# Altium PCB Flight_Controller.PcbDoc
Units mil, origin at the board's own origin, x right, y up, seen from the top; angles counter-clockwise.
Board outline 1417.32 x 1417.32 mil, 2 copper layers (Top Layer, Bottom Layer), stack 62.8 mil thick; 52 components, 47 nets, 221 pads, 95 vias.
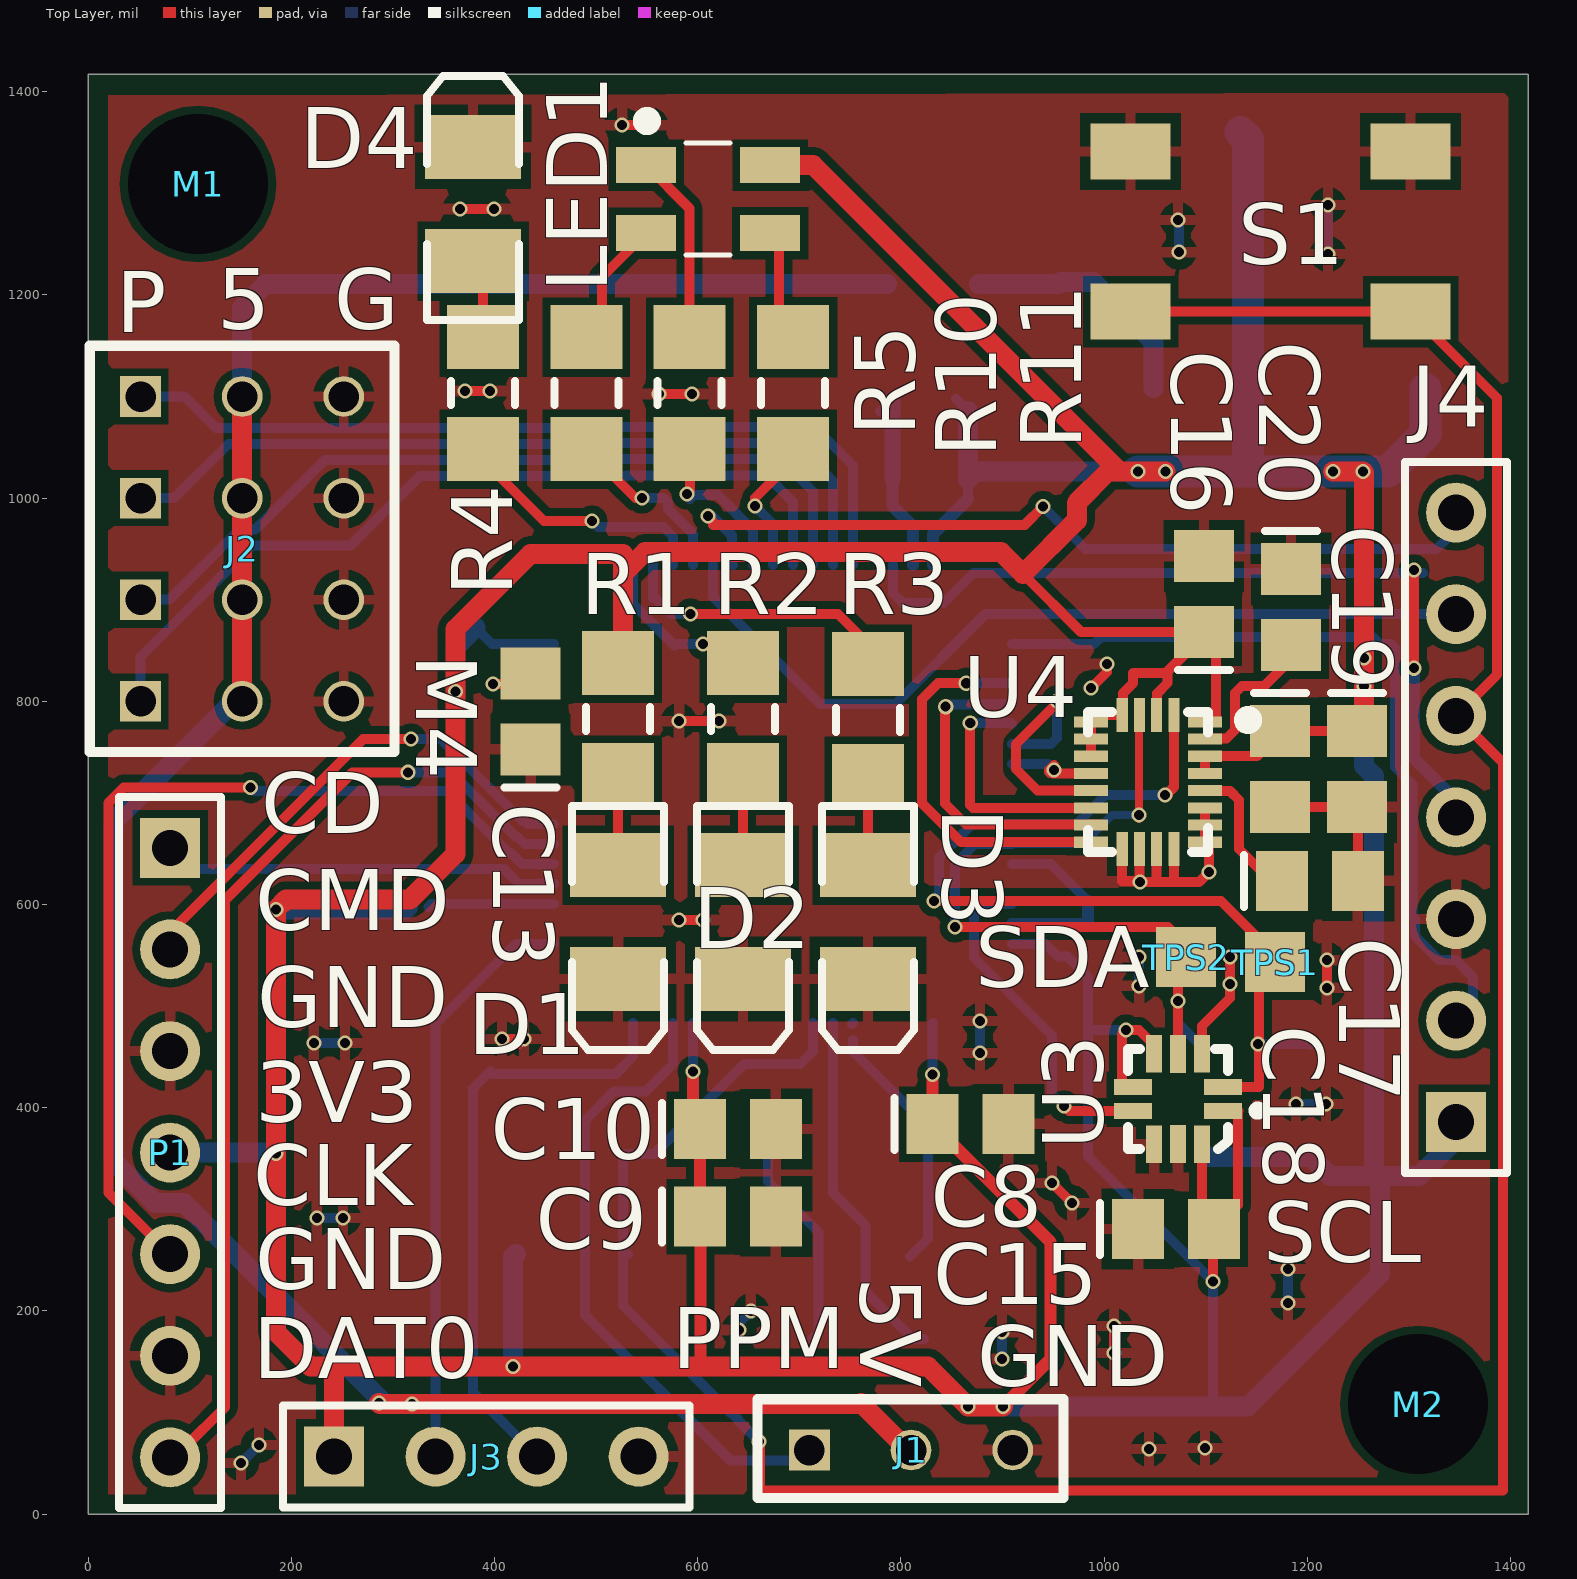
[diagram p0: Top Layer view]
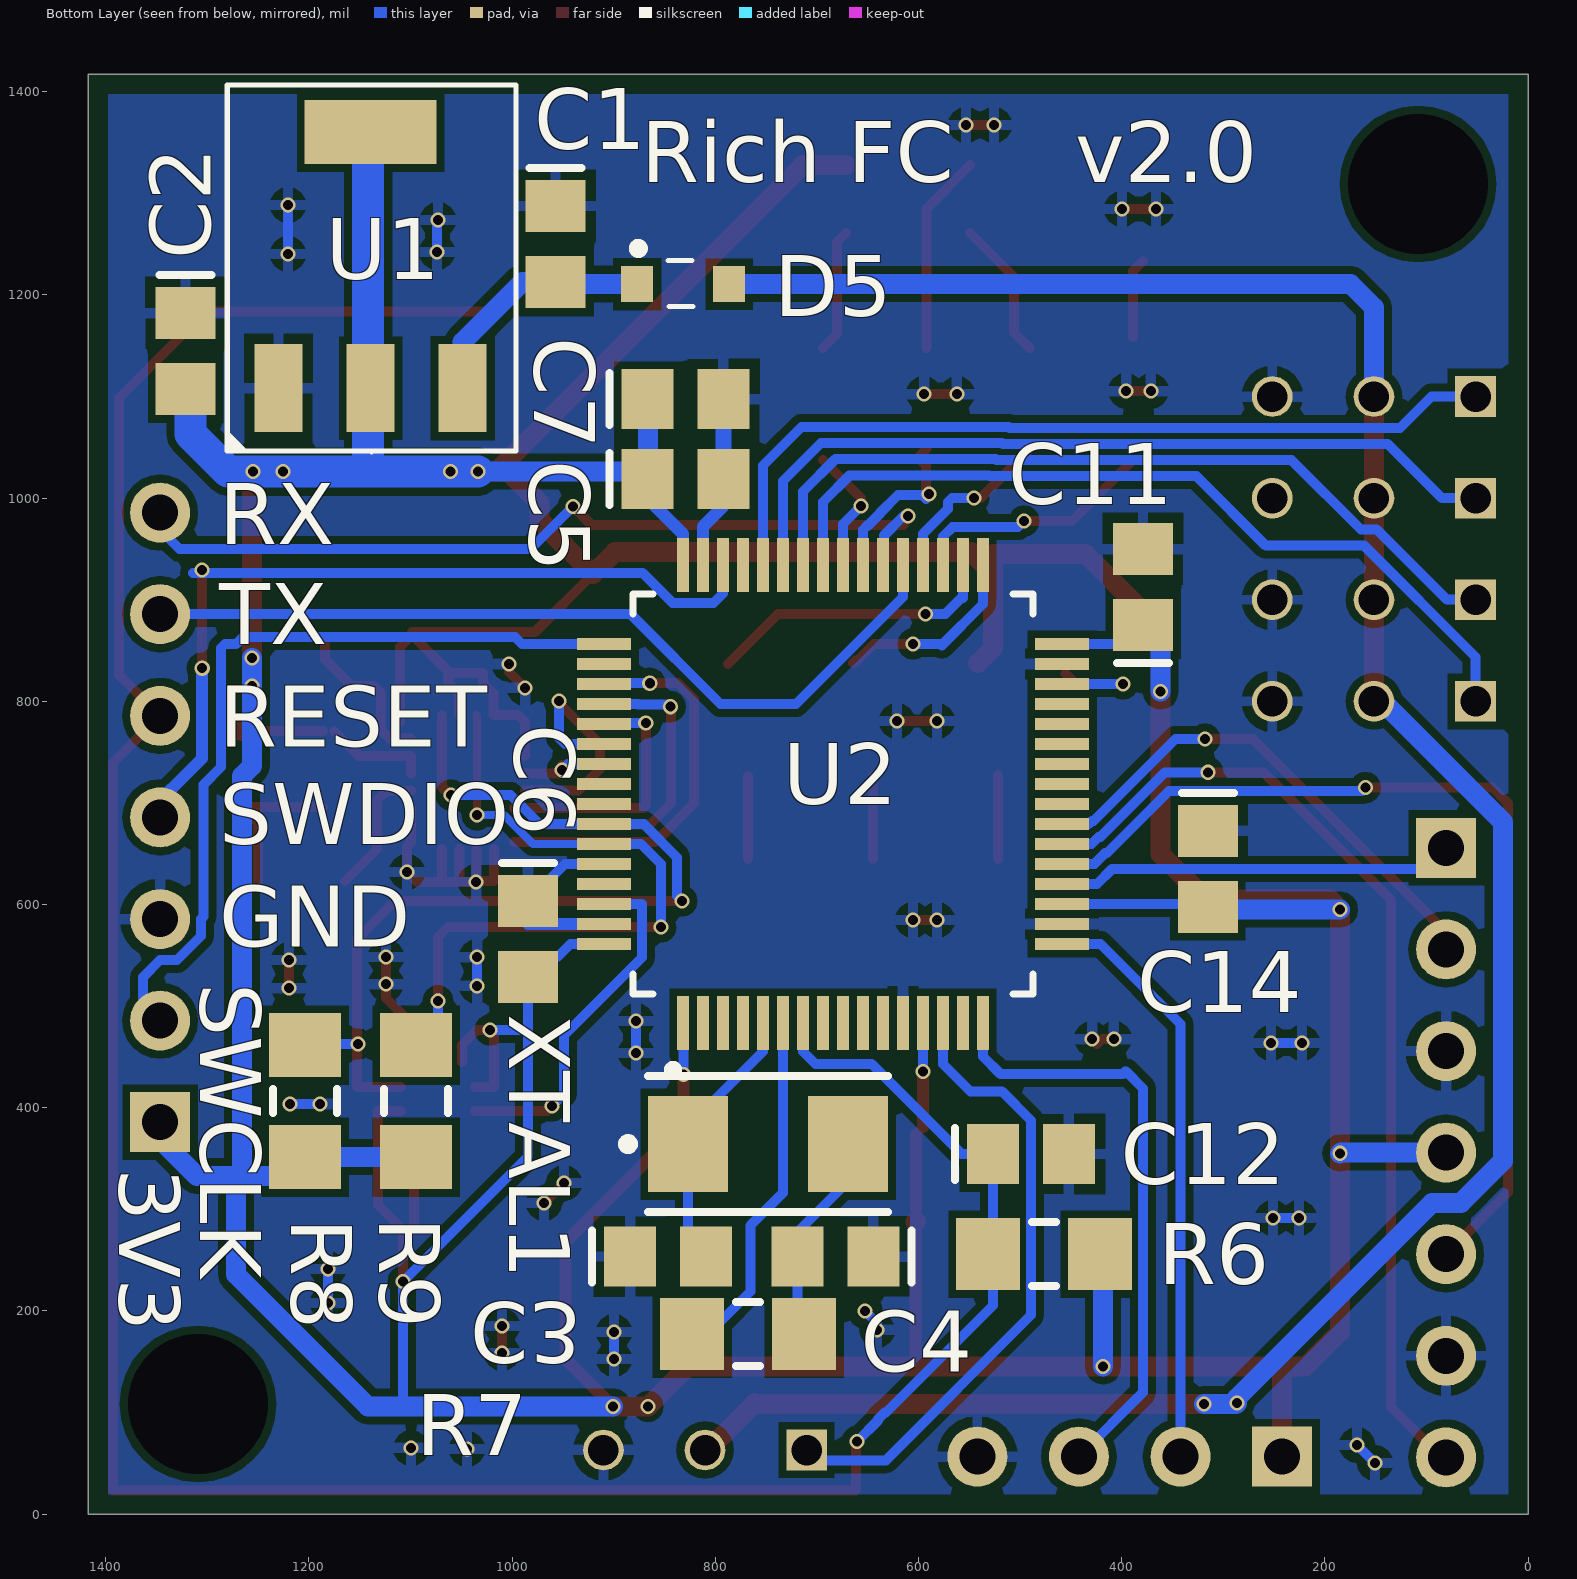
[diagram p1: Bottom Layer view, seen from below]

## Layer stack, top to bottom
Top Solder: solder mask 1, Solder Resist, Dk 3.5
Top Layer: signal copper 1.4
Dielectric 1: dielectric 60, FR-4, Dk 4.8
Bottom Layer: signal copper 1.4
Bottom Solder: solder mask 1, Solder Resist, Dk 3.5

## Board outline
0,0 1417.32,0 1417.32,1417.32 0,1417.32

## Design rules (kind name [scope] priority, off if disabled: settings)
BoardOutlineClearance [(OnLayer('Top Layer') OR OnLayer('Bottom Layer') OR OnLayer('Multi-Layer'))] p1: gap=15 ignorepadtopadclearanceinfootprint=FALSE
Clearance Clearance_Polygon [InPolygon and InNet('GND')] p1: gap=7.87 ignorepadtopadclearanceinfootprint=FALSE
Clearance [All] p2: gap=6 ignorepadtopadclearanceinfootprint=FALSE except(10: Fill-Fill Fill-Poly Fill-Region Poly-Poly Poly-Region Region-Region)
HoleSize [All] p1: absolutevalues=TRUE maxlimit=157.48 minlimit=1 maxpercent=80.000 minpercent=20.000
MinimumSolderMaskSliver [All] p1: minsoldermaskwidth=4
PolygonConnect [All] p1: connectstyle=Relief reliefconductorwidth=10 reliefentries=4 polygonreliefangle="90 Angle" airgapwidth=10
RoutingVias [All] p1: holewidth=10 width=15 viastyle="Through Hole" minholewidth=10 minwidth=15 maxholewidth=23.62 maxwidth=39.37
SolderMaskExpansion [All] p1: expansion=3.15
Width [All] p1: maxlimit=39.37 minlimit=6 preferedwidth=9.84 minimp=50.000000 maximp=50.000000 favimp=50.000000
28 further rules are at their usual default settings.

## Components (designator, comment, footprint, x,y, rotation, side; value= is the part's Value field where it differs from the comment)
C1 "Cap" C0805 957.18,1250 r270 bottom value=10uF
C2 "Cap" C0805 1321.36,1144.68 r270 bottom value=10uF
C3 "Cap" C0805 846.46,253.44 r180 bottom value=8pF
C4 "Cap" C0805 681.59,253.44 r0 bottom value=8pF
C5 "Cap" C0805 829.23,1018.7 r180 bottom value=100nF
C6 "Cap" C0805 984.25,565.94 r270 bottom value=100nF
C7 "Cap" C0805 829.23,1097.44 r180 bottom value=4.7uF
C8 "Cap" C0805 868.6,383.86 r0 top value=100nF
C9 "Cap" C0805 639.76,292.81 r0 top value=1uF
C10 "Cap" C0805 639.76,378.94 r0 top value=100nF
C11 "Cap" C0805 378.94,912.4 r90 bottom value=100nF
C12 "Cap" C0805 489.17,354.33 r180 bottom value=100nF
C13 "Cap" C0805 435.53,789.86 r90 top value=4.7uF
C14 "Cap" C0805 315,635 r270 bottom value=100nF
C15 "Cap" C0805 1070.87,280.51 r0 top value=100nF
C16 "Cap" C0805 1098.43,905.31 r90 top value=100nF
C17 "Cap" C0805 1212.6,623.03 r0 top value=10nF
C18 "Cap" C0805 1173.23,733.27 r270 top value=100nF
C19 "Cap" C0805 1249.02,733.27 r270 top value=10uF
C20 "Cap" C0805 1184.06,892.72 r270 top value=100nF
D1 "150141GS73100" 150141RS73100 521.65,582.68 r270 top
D2 "150141RS73100" 150141RS73100 644.69,582.68 r270 top
D3 "150141RS73100" 150141RS73100 767.72,582.68 r270 top
D4 "150141RS73100" 150141RS73100 378.94,1289.37 r90 top
D5 "Schottky Diode" SOD323 831.69,1210.63 r180 bottom
J1 "Header_3x1" Header_3x1 710.04,62.99 r90 top
J2 "Header 4x3" Header_4x3 151.67,899.9 r0 top
J3 "Header 4" HDR1X4 242.03,56.59 r0 top
J4 "Header 7" HDR1X7 1346.46,385.63 r90 top
LED1 "RGB" 1411LED 610.24,1294.29 r0 top
M1 "M3_Mounting_Hole" M3_Mounting_Hole 108.27,1309.06 r0 top
M2 "M3_Mounting_Hole" M3_Mounting_Hole 1309.06,108.27 r0 top
P1 "Header 7" HDR1X7 80.71,655.71 r270 top
R1 "Res" 3216[1206] 521.65,782.48 r270 top value=1K
R2 "Res" 3216[1206] 644.69,782.48 r270 top value=1K
R3 "Res" 3216[1206] 767.72,781.5 r270 top value=1K
R4 "Res" 3216[1206] 388.78,1103.35 r90 top value=1K
R5 "Res" 3216[1206] 490.49,1103.35 r90 top value=1K
R6 "Res" 3216[1206] 476.38,255.91 r180 bottom value=1K
R7 "Res" 3216[1206] 767.72,177.17 r180 bottom value=640
R8 "Res" 3216[1206] 1203.74,406.5 r90 bottom value=4.7k
R9 "Res" 3216[1206] 1094.49,406.5 r90 bottom value=4.7k
R10 "Res" 3216[1206] 592.19,1103.35 r90 top value=1K
R11 "Res" 3216[1206] 693.9,1103.35 r90 top value=1K
S1 "Pushbutton" TactileSwitch 1163.88,1262.3 r180 top
TPS1 "Test_point_SMD" TEST_POINT_SMD 1168.31,543.31 r90 top
TPS2 "Test_point_SMD" TEST_POINT_SMD 1080.71,548.23 r90 top
U1 "U_AZ1117EH-3.3TRG1" SOT223 1139.27,1225.39 r180 bottom
U2 "STM32F410RBT6" "LQFP-64 10x10mm" 684.06,708.66 r180 bottom
U3 "LPS25HB" "HLGA-10L - narrow" 1072.83,408.46 r180 top
U4 "LSM9DS1" "LGA-24 - NARROW - Long Pads" 1043.31,720.47 r270 top
XTAL1 "NX5032GA 25MHz" NX5032GA 748.03,364.17 r180 bottom

## Footprints (in the part's own frame and the unit in brackets; to place one, negate y for a bottom-side part, rotate by r counter-clockwise, add the part's x,y. Pads: shape width x height; smd on the part's side, far side on the other; paste and mask are expansions set on the pad)
1411LED [mm]
  rect 1.5x0.9 smd: 1(1.55,0.85) 2(1.55,-0.85) 3(-1.55,0.85) 4(-1.55,-0.85)
  silkscreen extent -1.7,-1.4 0.55,2.13, body extent -1.75,-1.4 1.75,1.4, height 1.89
3216[1206] [mm] "Chip Resistor; Body 3.2 x 1.6 mm (LxW typ)"
  rect 1.6x1.8 smd: 1(-1.4,0) 2(1.4,0)
  silkscreen extent -0.3,-0.8 0.3,0.8, body extent -1.6,-0.79 1.6,0.81, height 1
150141RS73100 [mm] "SMT LED; 1411"
  rect 1.6x2.4 smd: 1(-1.425,0) 2(1.425,0)
  silkscreen extent -2.9,-1.15 3.2,1.15, body extent -1.75,-1.4 1.75,1.4, height 1.6
C0805 [mm] "Chip Capacitor; Body 2.0 x 1.2 mm (LxW typ)"
  rect 1.3x1.5 smd: 1(-0.95,0) 2(0.95,0)
  silkscreen extent -1.9,-0.65 -1.9,0.65
HDR1X4 [mm] "Connector; Header; 4 Position"
  rect 1.5x1.5 hole 0.9: 1(0,0)
  round 1.5 hole 0.9: 2(2.54,0) 3(5.08,0) 4(7.62,0)
  silkscreen extent -1.27,-1.27 8.89,1.27
HDR1X7 [mm] "Connector; Header; 7 Position"
  rect 1.5x1.5 hole 0.9: 1(0,0)
  round 1.5 hole 0.9: 2(2.54,0) 3(5.08,0) 4(7.62,0) 5(10.16,0) 6(12.7,0) 7(15.24,0)
  silkscreen extent -1.27,-1.27 16.51,1.27
Header_3x1 [mil]
  rect 40x40 hole 30: 1(0,0)
  round 40 hole 30: 2(0,-100) 3(0,-200)
  silkscreen extent -47,-250 50,51
Header_4x3 [mil]
  rect 40x40 hole 30: 1(-100,200) 2(-100,100) 3(-100,0) 4(-100,-100)
  round 40 hole 30: 5(0,200) 6(0,100) 7(0,0) 8(0,-100) 9(100,200) 10(100,100) 11(100,0) 12(100,-100)
  silkscreen extent -150,-150 150,250
"HLGA-10L - narrow" [mm]
  rect 0.95x0.4 smd mask+0: 1(-1.12,0.3) 2(-1.12,-0.3) 6(1.12,-0.3) 7(1.12,0.3)
  rect 0.4x0.94 smd mask+0: 3(-0.6,-1.13) 5(0.6,-1.13) 8(0.6,1.13) 10(-0.6,1.13)
  rect 0.4x0.95 smd mask+0: 4(0,-1.12) 9(0,1.12)
  silkscreen extent -2.09,-1.25 1.25,1.25, body extent -1.25,-1.25 1.25,1.25, height 1
"LGA-24 - NARROW - Long Pads" [mm]
  rect 0.278x0.85 smd mask+0: 1(-1.505,1.425) 6(-1.505,-1.425) 7(-1.075,-1.425) 8(-0.645,-1.425) 9(-0.215,-1.425) 10(0.215,-1.425) 11(0.645,-1.425) 12(1.075,-1.425) 13(1.505,-1.425) 18(1.505,1.425) 19(1.075,1.425) 20(0.645,1.425) 21(0.215,1.425) 22(-0.215,1.425) 23(-0.645,1.425) 24(-1.075,1.425)
  rect 0.85x0.278 smd mask+0: 2(-1.675,0.645) 3(-1.675,0.215) 4(-1.675,-0.215) 5(-1.675,-0.645) 14(1.675,-0.645) 15(1.675,-0.215) 16(1.675,0.215) 17(1.675,0.645)
  silkscreen extent -1.75,-1.5 1.75,2.6, body extent -1.75,-1.5 1.75,1.5, height 1
"LQFP-64 10x10mm" [mm] "LQFP-64 10x10mm 0.5mm pitch"
  rect 0.29x1.35 smd mask+0.054: 1(-3.75,-5.725) 2(-3.25,-5.725) 3(-2.75,-5.725) 4(-2.25,-5.725) 5(-1.75,-5.725) 6(-1.25,-5.725) 7(-0.75,-5.725) 8(-0.25,-5.725) 9(0.25,-5.725) 10(0.75,-5.725) 11(1.25,-5.725) 12(1.75,-5.725) 13(2.25,-5.725) 14(2.75,-5.725) 15(3.25,-5.725) 16(3.75,-5.725) 33(3.75,5.725) 34(3.25,5.725) 35(2.75,5.725) 36(2.25,5.725) 37(1.75,5.725) 38(1.25,5.725) 39(0.75,5.725) 40(0.25,5.725) 41(-0.25,5.725) 42(-0.75,5.725) 43(-1.25,5.725) 44(-1.75,5.725) 45(-2.25,5.725) 46(-2.75,5.725) 47(-3.25,5.725) 48(-3.75,5.725)
  rect 1.35x0.29 smd mask+0.054: 17(5.725,-3.75) 18(5.725,-3.25) 19(5.725,-2.75) 20(5.725,-2.25) 21(5.725,-1.75) 22(5.725,-1.25) 23(5.725,-0.75) 24(5.725,-0.25) 25(5.725,0.25) 26(5.725,0.75) 27(5.725,1.25) 28(5.725,1.75) 29(5.725,2.25) 30(5.725,2.75) 31(5.725,3.25) 32(5.725,3.75) 49(-5.725,3.75) 50(-5.725,3.25) 51(-5.725,2.75) 52(-5.725,2.25) 53(-5.725,1.75) 54(-5.725,1.25) 55(-5.725,0.75) 56(-5.725,0.25) 57(-5.725,-0.25) 58(-5.725,-0.75) 59(-5.725,-1.25) 60(-5.725,-1.75) 61(-5.725,-2.25) 62(-5.725,-2.75) 63(-5.725,-3.25) 64(-5.725,-3.75)
  silkscreen extent -5,-7 5,5, body extent -6,-6 6,6, height 1.55
M3_Mounting_Hole [mm]
  round 1 hole 3.5 unplated mask+0: 0(0,0)
  body extent -3,-3 3,3, height 3
NX5032GA [mm] "NX5032GA Crystal Oscillator"
  rect 2x2.4 smd: 1(-2,0) 2(2,0)
  silkscreen extent -3.63,-1.7 3,1.7, body extent -2.51,-1.6 2.51,1.6, height 1.3
SOD323 [mm]
  rect 0.8x0.9 smd: 1(-1.15,0) 2(1.15,0)
  silkscreen extent -1.23,-0.56 0.25,1, body extent -0.83,-0.42 0.83,0.42, height 0.66
SOT223 [mm]
  rect 1.2x2.2 smd: 1(-2.3,-2.975) 2(0,-2.975) 3(2.3,-2.975)
  rect 3.3x1.6 smd: 4(0,3.425)
  silkscreen extent -3.58,-4.57 3.63,4.6, body extent -3.33,-2.93 3.43,3.86, height 1.3
TactileSwitch [mm]
  rect 2x1.4 smd: 1(-3.5,2) 1(3.5,2) 2(-3.5,-2) 2(3.5,-2)
TEST_POINT_SMD [mm]
  rect 1.5x1.5 smd: 1(0,0)

## Part data
C1 C2 C3 C4 C5 C6 C7 C8 C9 C10 C11 C12 C13 C14 C15 C16 C18 C19 C20: "Capacitor", LatestRevisionDate=17-Jul-2002, LatestRevisionNote="Re-released for DXP Platform.", PackageReference=C1206, Published=8-Jun-2000, Publisher="Altium Limited"
  C13: ESR="< 1 ohm"
C17: "Capacitor", Rating=16V, LatestRevisionDate=17-Jul-2002, LatestRevisionNote="Re-released for DXP Platform.", PackageReference=C1206, Published=8-Jun-2000, Publisher="Altium Limited"
D1: "Typical GREEN LED", Case/Package=1411, Case Code (Metric)=3528, Colour=Green, Forward Current=30, Forward Voltage=3.1, Manufacturer="Würth Elektronik (Wuerth Elektronik)", Max Operating Temperature=85, Min Operating Temperature=-40, Package Quantity=2000, Supplier Part Number 1=732-4997-1-ND, Test Current=20, Case Code (Imperial)=1411, ComponentLink1Description=https://datasheet.ciiva.com/23843/150141gs73100-23843266.pdf, ComponentLink1URL=https://datasheet.ciiva.com/23843/150141gs73100-23843266.pdf, ComponentLink2Description=https://datasheet.ciiva.com/22656/1911484-22656997.pdf, ComponentLink2URL=https://datasheet.ciiva.com/22656/1911484-22656997.pdf, ComponentLink3Description=https://datasheet.ciiva.com/29563/150141gs73100-29563029.pdf, ComponentLink3URL=https://datasheet.ciiva.com/29563/150141gs73100-29563029.pdf, ComponentLink4Description=https://datasheet.ciiva.com/29563/150141gs73100-29563030.pdf, ComponentLink4URL=https://datasheet.ciiva.com/29563/150141gs73100-29563030.pdf, ComponentLink5Description=https://datasheet.ciiva.com/48430/150141gs73100-eng-tds-48430060.pdf, ComponentLink5URL=https://datasheet.ciiva.com/48430/150141gs73100-eng-tds-48430060.pdf, ComponentLink6Description=https://datasheet.ciiva.com/29278/759463-da-01-en-smd-topled-einf-gruen-150141gs73100-29278953.pdf, ComponentLink6URL=https://datasheet.ciiva.com/29278/759463-da-01-en-smd-topled-einf-gruen-150141gs73100-29278953.pdf, Dominant Wavelength=525, Height=1.9, Lead Free="Lead Free", Length=3.5, Lens Style=Round,Clear, Luminous Intensity=1000, Manufacturer Part Number=150141GS73100, Packaging="Cut Tape", Pricing 1="1=0.17, 100=0.149, 500=0.113 (USD)", REACH SVHC=Unknown, Stock 1=572, Supplier 1=Digikey, Viewing Angle=120, Wavelength=525, Width=2.8
D2 D3 D4: "Typical RED LED", Case/Package=1411, Case Code (Metric)=3528, Colour=RED, Forward Current=30, Forward Voltage=2, Manufacturer="Würth Elektronik (Wuerth Elektronik)", Max Operating Temperature=85, Min Operating Temperature=-40, PackageDocument=Feb-2002, Package Quantity=2000, Test Current=20, Case Code (Imperial)=1411, ComponentLink1Description=https://datasheet.ciiva.com/29562/150141rs73100-29562993.pdf, ComponentLink1URL=https://datasheet.ciiva.com/29562/150141rs73100-29562993.pdf, ComponentLink2Description=https://datasheet.ciiva.com/29563/150141rs73100-29563031.pdf, ComponentLink2URL=https://datasheet.ciiva.com/29563/150141rs73100-29563031.pdf, ComponentLink3Description=https://datasheet.ciiva.com/29563/150141rs73100-29563032.pdf, ComponentLink3URL=https://datasheet.ciiva.com/29563/150141rs73100-29563032.pdf, ComponentLink4Description=https://datasheet.ciiva.com/29278/759464-da-01-en-smd-topled-einf-rot-150141rs73100-29278947.pdf, ComponentLink4URL=https://datasheet.ciiva.com/29278/759464-da-01-en-smd-topled-einf-rot-150141rs73100-29278947.pdf, Dominant Wavelength=625, Height=1.9, LatestRevisionDate=17-Jul-2002, LatestRevisionNote="Re-released for DXP Platform.", Length=3.5, Lens Style=Round,Clear, Luminous Intensity=300, Manufacturer Part Number=150141RS73100, PackageReference=3.2X1.6X1.1, Packaging="Tape and Reel", Pricing 2="1=0.17, 100=0.149, 500=0.113 (USD)", Published=8-Jun-2000, Publisher="Altium Limited", REACH SVHC=Unknown, Stock 2=5335, Supplier 1=Digi-Key, Supplier 2=Digikey, Supplier Part Number 2=732-5000-1-ND, Viewing Angle=120, Wavelength=625, Width=2.8
D5: library part DS_CUS08F30, "Diode Schottky 30V 800mA (DC) Surface Mount SOD-323", Capacitance @ Vr, F="170pF @ 0V, 1MHz", Current - Average Rectified (Io)=800mA, Current - Reverse Leakage @ Vr="50µA @ 30V", Manufacturer="Toshiba Semiconductor and Storage", Manufacturer Part Number=CUS08F30,H3F, Operating Temperature - Junction="125°C (Max)", Package / Case="SC-76, SOD-323", Supplier Device Package=USC, Supplier Part Number 1=CUS08F30H3FCT-ND, Voltage - DC Reverse (Vr) (Max)=30V, Voltage - Forward (Vf) (Max) @ If="220mV @ 10mA", Category="Discrete Semiconductor Products", ComponentLink1Description=https://toshiba.semicon-storage.com/info/docget.jsp?did=9019&prodName=CUS08F30, ComponentLink1URL=https://toshiba.semicon-storage.com/info/docget.jsp?did=9019&prodName=CUS08F30, Diode Type=Schottky, Mounting Type="Surface Mount", Packaging="Cut Tape (CT)", Part Status=Active, Pricing 1="1=0.49, 10=0.448, 25=0.3224, 100=0.2508, 250=0.15764, 500=0.13438, 1000=0.09138 (CAD)", Reverse Recovery Time (trr)=-, RoHS="RoHS Compliant", Speed="Fast Recovery =< 500ns, > 200mA (Io)", Stock 1=5288, Supplier 1=Digi-Key
J2: library part Header_4x3
J3: "Header, 4-Pin", LatestRevisionDate=17-Jul-2002, LatestRevisionNote="Re-released for DXP Platform.", Publisher="Altium Limited"
J4 P1: "Header, 7-Pin", LatestRevisionDate=17-Jul-2002, LatestRevisionNote="Re-released for DXP Platform.", Publisher="Altium Limited"
LED1: library part LED_150141M173100, "Wurth RGB LED 1411 pkg", Color="Red, Green, Blue (RGB)", Current - Test="20mA Red, 20mA Green, 20mA Blue", Lens Color=Colorless, Manufacturer="Wurth Electronics Inc", Manufacturer Part Number=150141M173100, Millicandela Rating="270mcd Red, 950mcd Green, 230mcd Blue", Package / Case="1411 (3528 Metric)", Supplier Device Package=3528, Supplier Part Number 1=732-4998-1-ND, Voltage - Forward (Vf) (Typ)="2V Red, 3.2V Green, 3.2V Blue", Category=Optoelectronics, ComponentLink1Description=http://katalog.we-online.de/led/datasheet/150141M173100.pdf, ComponentLink1URL=http://katalog.we-online.de/led/datasheet/150141M173100.pdf, Features=-, Height (Max)=2.10mm, Lens Style/Size="Round with Flat Top, 2.40mm", Lens Transparency=Clear, Mounting Type="Surface Mount", Packaging="Cut Tape (CT)", Pricing 1="1=0.95, 50=0.8294, 100=0.7583, 500=0.68724, 1000=0.63984 (CAD)", RoHS="RoHS Compliant", Size / Dimension="3.50mm L x 2.80mm W", Stock 1=986, Supplier 1=Digi-Key, Viewing Angle=120°, Wavelength - Dominant="625nm Red, 520nm Green, 470nm Blue", Wavelength - Peak="635nm Red, 515nm Green, 465nm Blue"
R1 R2 R3 R4 R5 R6 R7 R8 R9 R10 R11: "Surface Mount Resistor", LatestRevisionDate=17-Jul-2002, LatestRevisionNote="Re-released for DXP Platform.", PackageReference=AXIAL-0.5, Published=8-Jun-2000, Publisher="Altium Limited"
TPS1 TPS2: "Test Point SMD"
U1: "IC LDO 3.3V 1A", Current - Limit (Min)=-, Current - Output=1A, Manufacturer="Diodes Incorporated", Manufacturer Part Number=AZ1117EH-3.3TRG1, Operating Temperature="-40°C ~ 125°C", Package / Case="TO-261-4, TO-261AA", Supplier Device Package=SOT-223, Supplier Part Number 1=AZ1117EH-3.3TRG1DICT-ND, Voltage - Dropout (Typical)="1.1V @ 1A", Voltage - Input="Up to 13V", Voltage - Output=3.3V, Category="Integrated Circuits (ICs)", ComponentLink1Description=http://www.diodes.com/_files/datasheets/AZ1117E.pdf, ComponentLink1URL=http://www.diodes.com/_files/datasheets/AZ1117E.pdf, Mounting Type="Surface Mount", Number of Regulators=1, Packaging="Cut Tape (CT)", Pricing="1=0.61, 10=0.456, 100=0.2578, 500=0.1709, 1000=0.13108 (CAD)", Regulator Topology="Positive Fixed", RoHS="RoHS Compliant", Stock 1=13427, Supplier 1=Digi-Key
U2: library part STM32F410RB_PINOUT, "64-LQFP - Pinout Representation", Case/Package=LQFP, Frequency=100, Manufacturer=STMicroelectronics, Max Operating Temperature=85, Max Supply Voltage=3.6, Min Operating Temperature=-40, Min Supply Voltage=1.7, Supplier Part Number 1=497-16239-ND, ComponentLink1Description=http://www.farnell.com/datasheets/2006536.pdf, ComponentLink1URL=http://www.farnell.com/datasheets/2006536.pdf, Interface=I2C,SPI,IrDA,UART,USART,LIN, Lead Free="Lead Free", Manufacturer Part Number=STM32F410RBT6, Memory Size=128, Memory Type=FLASH, Number of I/Os=50, Number of Pins=64, Oscillator Type=Internal, Packaging=Tray, Peripherals="Brown-out Detect/Reset,POR,PWM,WDT,DMA", Pricing 2="1=4.4, 10=3.951, 100=3.237, 500=2.7556, 1000=2.324 (USD)", RAM Size=32, REACH SVHC="No SVHC", Supplier 1=Digikey
U3: Manufacturer=STMicroelectronics, Manufacturer Part Number=LPS25HBTR, Max Operating Temperature=105, Max Supply Voltage=3.6, Min Operating Temperature=-30, Min Supply Voltage=1.7, Operating Pressure=18.27, Supplier Part Number 1=497-15070-6-ND, ComponentLink1Description=http://www.farnell.com/datasheets/1992925.pdf, ComponentLink1URL=http://www.farnell.com/datasheets/1992925.pdf, ComponentLink2Description=http://www.st.com/st-web-ui/static/active/en/resource/technical/document/datasheet/DM00141379.pdf, ComponentLink2URL=http://www.st.com/st-web-ui/static/active/en/resource/technical/document/datasheet/DM00141379.pdf, Contact Plating=Nickel,Gold, Lead Free="Lead Free", Max Pressure=290.08, Mount="Surface Mount", Number of Pins=10, Port Style="No Port", Pricing 1="1=3.25, 10=2.917, 100=2.3901 (USD)", REACH SVHC="No SVHC", Stock 1=0, Supplier 1=Digikey, Termination=Solder
U4: Case/Package=LGA, Manufacturer=STMicroelectronics, Manufacturer Part Number=LSM9DS1TR, Max Operating Temperature=85, Max Supply Voltage=3.6, Min Operating Temperature=-40, Min Supply Voltage=1.9, Supplier Part Number 1=497-14946-6-ND, ComponentLink1Description=http://www.farnell.com/datasheets/2028150.pdf, ComponentLink1URL=http://www.farnell.com/datasheets/2028150.pdf, Lead Free="Lead Free", Number of Pins=24, Packaging="Cut Tape", Pricing 1="1=6.4, 10=5.751, 100=4.7119 (USD)", REACH SVHC="No SVHC", Stock 1=6141, Supplier 1=Digikey
XTAL1: library part NX5032GA, "NX5032GA", Case/Package=SMD/SMT, ESR (Equivalent Series Resistance)=70, Frequency=25, Frequency Stability=50, Load Capacitance=8, Manufacturer="Nihon Dempa Kogyo (NDK)", Manufacturer Part Number=NX5032GA-25.000000MHZ-LN-CD-1, Min Operating Temperature=-10, Package Quantity=1000, Supplier Part Number 1=644-1041-1-ND, ComponentLink1Description=https://datasheet.ciiva.com/856/nx5032ga-856797.pdf, ComponentLink1URL=https://datasheet.ciiva.com/856/nx5032ga-856797.pdf, ComponentLink2Description=https://datasheet.ciiva.com/856/nx5032ga-856798.pdf, ComponentLink2URL=https://datasheet.ciiva.com/856/nx5032ga-856798.pdf, ComponentLink3Description=https://datasheet.ciiva.com/856/nx5032ga-856799.pdf, ComponentLink3URL=https://datasheet.ciiva.com/856/nx5032ga-856799.pdf, Frequency Tolerance=50, Height=0.059, Length=0.197, Max Operating Temperature=70, Number of Pins=2, Packaging="Tape and Reel", Pricing 1="1=0.66, 10=0.55, 50=0.495, 100=0.44, 500=0.418 (USD)", Stock 1=128038, Supplier 1=Digikey, Width=0.126

## Via types
v1: diameter 15, hole 10, Top Layer to Bottom Layer, tented both sides, 62 vias
v2: diameter 15, hole 10, Top Layer to Bottom Layer, 33 vias

## Nets (pads, with @x,y where several pads share a name; then routed paths per layer and width w, separated by ;. In a path a pad name is that pad's centre, name@x,y a point inside that pad or via, vN(x,y) a via of type N, cw(c..) or ccw(c..) an arc to the next point about the centre after c; other vN are vias at no path point)
5V: D5.2 J1.2 J2.5 J2.6 J2.7 J2.8 | length 2481.4
  Top Layer w19.68: J2.8 J2.7 J2.6 J2.5 ; v2(286.42,109.25) 287.4,108.27 v2(318.9,108.27) 759.84,108.27 760.83,109.25 807.09,62.99 J1.2
  Bottom Layer w19.68: J2.8 143.44,799.9 24.84,681.3 24.84,347.41 66.15,306.1 94.48,306.1 286.42,114.16 v2(286.42,109.25) 287.4,108.27 v2(318.9,108.27) ; J2.5 151.67,1187.6 174.7,1210.63 D5.2
DEN_A/G: U2.51 U4.13 | length 391.5
  Top Layer w9.84: v1@864.96,817.72 v1(864.37,817.72) 836.61,817.72 820.87,801.97 820.87,699.5 859.15,661.22 U4.13 U4.13@998.03,661.22
  Bottom Layer w9.84: v1(864.37,817.72) 908.66,817.72 U2.51
DRDY_B: U2.62 U3.7 | length 351.1
  Top Layer w9.84: v2(960.63,401.57) 965.55,396.65 U3.7 U3.7@1036.61,396.65
  Bottom Layer w9.84: U2.62 871.95,600.39 871.95,547.83 948.82,470.96 948.82,413.39 v2(960.63,401.57)
DRDY_M: U2.55 U4.9 | length 101.9
  Top Layer w9.84: v1@946.9,729.38 945.87,730.41 v1@945.87,732.37 ; v1(950.79,732.28) 950.79,737.29 v1@945.87,732.37 ; U4.9 949.3,728.94 v1@945.87,732.37
  Bottom Layer w9.84: U2.55 944.88,738.19 v1(950.79,732.28)
GND: C1.1 C2.1 C3.1 C4.1 C5.2 C6.1 C7.2 C8.2 C9.2 C10.2 C11.2 C12.2 C13.1 C14.1 C15.1 C16.2 C17.2 C18.2 C19.2 C20.1 D1.2 D2.2 D3.2 D4.2 J1.3 J2.9 J2.10 J2.11 J2.12 J3.4 J4.3 P1.3 P1.6 S1.2 U1.1 U2.12 U2.18 U2.31 U2.47 U2.60 U2.63 U3.3 U3.8 U3.9 U4.14 U4.15 U4.16 U4.17 U4.18 U4.19 U4.20 | length 1596.6
  Top Layer w9.84: v1(366.14,1284.45) v1(399.61,1284.45) ; v1(371.06,1105.32) v1(395.67,1105.32) ; v1(407.48,467.52) 419.29,467.52 424.21,462.6 v1(429.13,467.52) ; v1(525.59,1367.13) v1(553.15,1367.13) ; v1(562.01,1102.36) v1(594.49,1102.36) ; v1@579.72,780.51 v1(581.69,780.51) v1(621.06,780.51) ; v1(581.69,584.65) v1(605.32,584.65) ; v1(948.82,325.79) v1(968.5,306.1) ; v1(987.2,812.99) 1002.95,828.74 v1(1002.95,836.61) ; v1(1009.84,158.46) v1(1009.84,185.04) ; U4.14 1017.91,623.03 1033.46,623.03 1035.43,621.06 v1(1035.43,622.2) ; U4.15 1034.84,622.8 v1(1035.43,622.2) ; U4.16 1051.77,623.62 1050.35,622.2 ; U4.17 1068.7,622.83 1068.07,622.2 ; U3.3@1096.75,445.37 1096.45,445.08 U3.3 1096.45,480.31 1124.02,507.87 v1(1124.02,521.65) v1(1124.02,548.23) v1@1125,548.23 ; v1(1099.41,64.96) v1@1099.41,67.91 ; U4.20 U4.19 U4.18 1103.35,657.28 v1(1103.35,631.89) 1093.66,622.2 1068.07,622.2 ; C18.2@1186.02,695.87 C19.2 1265.75,695.87 1250,680.12 C17.2 ; v1(1219.49,517.72) v1(1219.49,545.28) ; v1(1035.43,622.2) 1050.35,622.2 ; 1050.35,622.2 1068.07,622.2
  Bottom Layer w9.84: v1(150.59,50.2) v1(168.31,67.91) ; v1(222.44,463.58) v1(252.95,463.58) ; v1(225.39,291.34) v1(250.98,291.34) ; v1(640.75,181.1) 640.75,187.99 v1(652.56,199.8) ; C7.2@779.53,1085.14 C7.2 ; v1(877.95,453.74) v1(877.95,485.24) ; v1(899.61,152.56) v1(899.61,179.13) ; U2.60 947.83,639.76 C6.1 ; v1(1034.45,519.68) v1(1034.45,548.23) ; v1(1072.83,1273.62) 1073.82,1272.64 v1(1073.82,1242.13) ; v1(1181.1,207.68) v1(1181.1,241.14) ; v1@1187.99,403.54 v1(1188.98,403.54) v1(1218.5,403.54) ; v1(1220.47,1240.16) v1(1220.47,1288.39)
  Bottom Layer w11.81: C5.2 791.83,992.13 812.01,971.95 U2.47 ; U2.63 984.25,580.71 C6.1
  Bottom Layer w15.75: C5.2 C7.2
  other v1: 1044.29,63.98
INT1_A/G: U2.53 U4.11 | length 253.1
  Top Layer w9.84: v1(868.3,778.54) 868.3,697.83 871.06,695.08 U4.11 U4.11@998.03,695.08
  Bottom Layer w9.84: v1(868.3,778.54) 908.46,778.54 U2.53
INT2_A/G: U2.52 U4.12 | length 325.1
  Top Layer w9.84: v1@843.5,794.67 843.5,699.27 864.08,678.69 U4.12@986.66,678.69 ; U4.12 U4.12@986.66,678.69 ; U4.12@997.49,678.69 U4.12@986.66,678.69
  Bottom Layer w9.84: v1(844.11,794.67) 846.41,796.96 875.93,796.96 876.21,797.24 U2.52
INT_M: U2.54 U4.10 | length 249.4
  Top Layer w9.84: v1(953.74,800.2) 953.74,798.23 913.39,757.87 913.39,733.27 934.65,712.01 U4.10
  Bottom Layer w9.84: U2.54 947.83,757.87 953.74,763.78 v1(953.74,800.2)
LED1: R2.1 U2.33 | length 192.2
  Top Layer w9.84: v1(605.32,856.3) 643.7,856.3 660.92,839.07 661.91,840.06 R2.1@664.37,837.6
  Bottom Layer w9.84: U2.33 536.42,895.67 577.02,855.07 578.25,856.3 v1(605.32,856.3)
LED2: R3.1 U2.34 | length 290.7
  Top Layer w9.84: v1(593.01,885.83) 738.19,885.83 R3.1@787.4,836.61
  Bottom Layer w9.84: U2.34 556.1,901.57 557.86,901.57 573.61,885.83 v1(593.01,885.83)
LED3: R4.1 U2.35 | length 246.2
  Top Layer w9.84: R4.1@388.78,1037.4 448.82,977.36 v2(496.06,977.36)
  Bottom Layer w9.84: v2(496.06,977.36) 501.87,971.55 566.33,971.55 575.79,962.1 U2.35
LED_B: R11.1 U2.40 | length 126.2
  Top Layer w9.84: v2(656.5,992.13) 656.5,1000 R11.1@693.9,1037.4
  Bottom Layer w9.84: v2(656.5,992.13) 674.21,974.41 U2.40
LED_G: R5.1 U2.36 | length 174.2
  Top Layer w9.84: R5.1 538.71,1000 v2(545.28,1000)
  Bottom Layer w9.84: v2(545.28,1000) 566.93,1000 570.87,996.06 570.87,989.42 595.47,964.82 U2.36
LED_R: R10.1 U2.39 | length 164.8
  Top Layer w9.84: v2(589.57,1003.94) 592.52,1006.89 592.52,1032.15 600.39,1040.03 R10.1
  Bottom Layer w9.84: v2@592.52,999.02 596.46,1002.95 620.08,1002.95 638.07,984.96 638.07,984.5 648.87,973.7 649.33,973.7 654.53,968.5 U2.39
NetC1_2: C1.2 D5.1 U1.3 | length 242.3
  Bottom Layer w19.68: D5.1 955.22,1210.63 C1.2 989.67,1212.6 1048.72,1153.54 U1.3
NetC4_2: C4.2 R7.2 XTAL1.2 | length 215.2
  Bottom Layer w9.84: XTAL1.2 669.29,327.26 719,277.56 C4.2 719,178.64 R7.2@712.6,172.24
NetC13_2: C13.2 U2.30 | length 120.9
  Top Layer w9.84: v2(398.62,816.93) 444.88,816.93 C13.2@455.22,827.26
  Bottom Layer w9.84: v2(398.62,816.93) U2.30
NetC17_1: C17.1 U4.21 | length 130.4
  Top Layer w9.84: U4.21 1099.41,711.46 1124.17,711.46 1132.78,702.85 1132.78,665.75 1132.87,665.66 1132.87,654.53 C17.1@1164.37,623.03
NetC20_2: C20.2 U4.24 | length 152.6
  Top Layer w9.84: U4.24 1099.95,763.34 1120.67,763.34 1128.94,771.61 1128.94,808.07 1135.83,814.96 1157.78,814.96 1184.06,841.23 C20.2
NetD1_1: D1.1 R1.2 | length 82.7
  Top Layer w9.84: D1.1@521.65,644.68 R1.2
NetD2_1: D2.1 R2.2 | length 82.7
  Top Layer w9.84: D2.1@644.69,644.69 R2.2
NetD3_1: D3.1 R3.2 | length 81.7
  Top Layer w9.84: D3.1@767.72,644.68 R3.2
NetD4_1: D4.1 R4.2 | length 78.9
  Top Layer w9.84: D4.1 388.78,1223.43 R4.2
NetJ4_2: J4.2 U2.49 | length 792.7
  Bottom Layer w9.84: U2.49 990.19,856.3 997.18,863.28 1264.51,863.28 1271.49,856.3 1282.48,856.3 1286.42,852.36 1286.42,735.15 1303.66,717.91 1303.66,587.96 1306.01,585.61 1306.01,568.88 1329.7,545.18 1346.43,545.18 1363.19,528.43 J4.2@1363.19,485.63
NetJ4_4: J4.4 U2.46 | length 833.5
  Top Layer w9.84: v2(1305.02,832.58) 1305.02,929.04 v2(1305.12,929.13)
  Bottom Layer w9.84: U2.46 792.32,906.01 801.78,896.56 841.93,896.56 871.44,926.08 1313.98,926.08
  Bottom Layer w11.81: v2(1305.02,832.58) 1305.02,743.8 J4.4@1363.19,685.63
NetLED1_2: LED1.2 R11.2 | length 122.6
  Top Layer w9.84: LED1.2 680.12,1251.97 680.12,1161.42 R11.2@693.9,1147.64
NetLED1_3: LED1.3 R10.2 | length 197.9
  Top Layer w9.84: LED1.3 592.19,1284.78 R10.2 R10.2@592.19,1147.64
NetLED1_4: LED1.4 R5.2 | length 137.5
  Top Layer w9.84: R5.2@490.49,1147.64 505.91,1163.06 505.91,1217.52 LED1.4
OSC_IN: C3.2 U2.5 XTAL1.1 | length 252.4
  Bottom Layer w9.84: U2.5@751.97,482.28 U2.5 ; U2.5@752.95,466.54 752.95,455.22 826.77,381.4 XTAL1.1 826.77,271.16 C3.2
OSC_OUT: R7.1 U2.6 | length 354.5
  Bottom Layer w9.84: U2.6 733.27,316.13 765.26,284.15 765.26,219 812.01,172.24 R7.1@822.83,172.24
PPM_IN: J1.1 U2.14 | length 625.9
  Bottom Layer w9.84: U2.14 575.79,442.91 548.72,415.85 517.53,415.85 489.08,387.4 489.08,195.86 632,52.94 699.98,52.94 J1.1
PWM_1: J2.1 U2.44 | length 828.1
  Bottom Layer w9.84: J2.1 95.1,1099.9 126.02,1068.98 510.16,1068.98 511.07,1069.89 715.11,1069.89 752.95,1032.05 U2.44
PWM_2: J2.2 U2.43 | length 802.2
  Bottom Layer w9.84: J2.2 84.9,999.9 138.14,1053.14 516.73,1053.14 517.63,1054.04 695.96,1054.04 733.27,1016.73 U2.43
PWM_3: J2.3 U2.42 | length 804.7
  Bottom Layer w9.84: J2.3 79.9,899.9 148.98,968.98 164.48,968.98 232.8,1037.3 523.29,1037.3 524.19,1038.2 681.8,1038.2 713.58,1006.42 U2.42
PWM_4: J2.4 U2.41 | length 832.9
  Bottom Layer w9.84: J2.4 51.67,843.63 161.18,953.14 258.14,953.14 326.45,1021.45 529.85,1021.45 530.76,1022.36 667.64,1022.36 693.9,996.1 U2.41
RESET: C12.1 J4.5 R6.1 S1.1 U2.7 | length 2915.1
  Top Layer w9.84: v2@661.48,72.35 661.48,23.56 661.83,23.21 1392.72,23.21 1392.72,739.37 J4.5 ; S1.1@1026.08,1183.56 S1.1@1291.34,1183.56 ; S1.1@1301.67,1183.56 1386.91,1098.33 1386.91,826.08 J4.5 ; J4.5@1328.05,785.63 J4.5 ; J4.5@1363.19,785.63 J4.5
  Bottom Layer w9.84: R6.1 R6.1@526.57,260.83 ; v2(660.48,71.36) 639.58,92.26 639.58,93.42 633.19,99.82 632.02,99.82 526.57,205.26 R6.1@526.57,260.83 ; U2.7 713.58,455.22 701.27,442.91 645.97,442.91 557.39,354.33 C12.1 R6.1@526.57,260.83
RF_COM_RX: J3.3 U2.16 | length 593.8
  Bottom Layer w9.84: J3.3 378.84,119.78 378.84,418.84 395.53,435.53 396.68,435.53 398.87,433.35 519.47,433.35 536.42,450.3 U2.16
RF_COM_TX: J3.2 U2.17 | length 574.9
  Bottom Layer w9.84: J3.2 342.03,482.28 420.77,561.02 U2.17
SENSOR_SCL: R8.2 TPS1.1 U2.58 U3.2 U4.2 | length 953.9
  Top Layer w9.84: v1(832.68,603.35) 1115.16,603.35 1152.56,565.94 1152.56,420.27 U3.2 U3.2@1109.05,420.27 ; v1(1060.09,707.71) v1@1061.06,707.71 ; v1@1062.96,707.71 v1@1061.06,707.71 ; U4.2 1068.7,715.35 v1@1061.06,707.71
  Bottom Layer w9.84: v1(832.68,603.35) 837.5,608.17 837.5,646.33 870.31,679.13 U2.58 972.96,679.13 1001.54,707.71 v1(1060.09,707.71) ; v1@1152.56,462.6 1202.76,462.6 R8.2
  other v1: 1151.57,462.6
SENSOR_SDA: R9.2 TPS2.1 U2.59 U3.4 U4.4 | length 767.6
  Top Layer w7.87: v1@1034.45,684.06 v1(1034.45,687.99) 1034.45,786.02 U4.4
  Top Layer w9.84: v1(853.35,577.76) 1062.99,577.76 1072.83,567.92 U3.4 U3.4@1072.83,444.68
  Bottom Layer w7.87: U2.59 979.33,659.45 1007.87,687.99 v1(1034.45,687.99)
  Bottom Layer w9.84: v1(853.35,577.76) 853.35,639.76 873.03,659.45 U2.59 ; v2@1072.83,507.87 1072.83,483.27 R9.2
  other v2: 1072.83,504.92
SPI1_MISO: P1.7 U2.22 | length 983.8
  Top Layer w9.84: P1.7@72.24,64.17 93.7,64.17 135,105.47 135,604.52 260.48,730 v2(315,730)
  Bottom Layer w9.84: v2(315,730) 357.35,730 421,666.35 422.76,666.35 429.66,659.45 U2.22
SPI1_MOSI: P1.2 U2.23 | length 515
  Top Layer w9.84: P1.2@63.98,555.91 270.87,762.8 v2(317.91,762.8)
  Bottom Layer w9.84: v2(317.91,762.8) 346.96,762.8 427.56,682.19 429.32,682.19 432.38,679.13 U2.23
SPI1_NSS: P1.1 U2.20 | length 409.5
  Bottom Layer w9.84: P1.1@63.98,655.91 85.22,634.66 409.64,634.66 424.22,620.08 U2.20
SPI1_SCK: P1.5 U2.21 | length 938.4
  Top Layer w9.84: P1.5@63.98,255.91 63.98,272.44 19.92,316.5 19.92,699.92 35,715 v2(160,715)
  Bottom Layer w9.84: v2(160,715) 163.42,711.58 353.36,711.58 414.44,650.5 416.2,650.5 426.94,639.76 U2.21
UART_RX: J4.7 U2.38 | length 860.7
  Top Layer w9.84: v2(610.24,982.28) 610.24,981.36 616.38,975.21 614.88,973.7 922.03,973.7 v2(939.96,991.63)
  Bottom Layer w9.84: v2(610.24,982.28) 614.66,982.28 634.06,962.89 634.06,934.86 U2.38 ; v2(939.96,991.63) 981.79,949.8 1327.36,949.8 J4.7@1363.19,985.63
UART_TX: J4.6 U2.37 | length 859.8
  Bottom Layer w9.84: U2.37 615.16,902.56 720.47,797.24 794.78,797.24 883.17,885.63 J4.6 J4.6@1363.19,885.63
VDD: C2.2 C5.1 C6.2 C7.1 C8.1 C9.1 C10.1 C11.1 C14.2 C15.2 C16.1 C18.1 C19.1 J3.1 J4.1 LED1.1 P1.4 R1.1 R6.2 R8.1 R9.1 U1.2 U1.4 U2.1 U2.13 U2.19 U2.32 U2.48 U2.64 U3.1 U3.5 U3.6 U3.10 U4.1 U4.3 U4.5 U4.6 U4.7 U4.8 U4.22 U4.23 | length 8859.2
  Top Layer w9.84: C10.1@595.47,380.91 C10.1@602.36,374.02 ; C9.1@602.36,287.89 C9.1 C9.1@602.36,300.2 ; 920.28,925.2 977.56,867.91 C16.1 C16.1@1098.43,865.16 ; U4.8 U4.7 U4.6 993.9,786.42 U4.5 1018.46,786.96 1018.46,807.67 1028.74,817.96 1028.74,827.56 1060.83,827.56 C16.1@1098.43,865.16 ; U3.6@1036.61,420.27 U3.6 1017.72,420.27 1017.72,472.44 v2(1021.65,476.38) 1034.45,476.38 1049.21,461.62 U3.5 U3.5@1049.21,445.08 ; U4.3 1052.31,786.96 1052.31,807.67 1062.6,817.96 1062.6,825.79 ; C15.2@1096.46,280.51 U3.10 U3.10@1096.46,372.24 ; U4.22 U4.23 1150.39,745.87 C18.1@1175.2,770.67 ; v2(1107.28,228.84) 1107.28,279.53 C15.2 1131.89,304.13 1131.89,396.16 1132.38,396.65 U3.1 U3.1@1109.05,396.65 ; U4.1@1110.24,779.72 1110.24,853.35 C16.1@1098.43,865.16 ; C18.1@1186.02,770.67 C19.1 C19.1@1265.75,770.67
  Top Layer w11.81: C10.1@595.47,380.91 v2@595.47,433.07 ; C9.1@602.36,300.2 C10.1@602.36,374.02 ; 602.85,145.18 C9.1@602.85,287.4 ; v2(831.2,432.58) C8.1 947.34,267.72 947.34,152.56 v2(900.59,105.81)
  Top Layer w19.68: J3.1 242.03,145.08 242.13,145.18 ; R1.1@541.34,837.6 526.57,852.36 526.57,925.2 ; C9.1@602.36,287.89 C9.1@602.85,287.4 ; LED1.1 713.58,1327.76 1015.26,1026.08 ; v2(900.59,105.81) v2(866.14,105.81) 826.77,145.18 602.85,145.18 v2(418.31,145.18) 242.13,145.18 ; v2(1060.53,1026.08) v2(1033.46,1026.08) 1015.26,1026.08 ; v2(1225.39,1026.08) v2(1254.92,1026.08) 1255.91,1025.1 v2(1255.91,842.52) v2(1255.91,814.96) 1255.91,780.51 C19.1@1265.75,770.67 ; 242.13,145.18 219,145.18 185,179.17 v2(185,355) 185,497.5 v2(185,595) 195,605 317.11,605 361.71,649.61 v2(361.71,809.55) 361.71,871.06 435.53,944.88 526.57,944.88 526.57,925.2 ; 526.57,925.2 548.23,946.85 898.62,946.85 920.28,925.2 973.18,978.1 973.18,995.32 1003.94,1026.08 1015.26,1026.08
  Bottom Layer w9.84: C14.2@335,597.6 337.8,600.39 U2.19 ; C11.1 381.4,872.54 397.64,856.3 U2.32 ; v2@595.47,433.07 v2(595.47,435.53) U2.13 ; v2(831.2,432.58) 831.2,482.78 U2.1 ; C7.1@854.33,1097.44 C7.1@866.14,1085.63 ; C5.1@866.14,999.02 C5.1@866.14,1018.7 ; U2.64 942.42,561.02 954.72,548.72 964.07,548.72 C6.2 984.25,476.38 ; v2(1021.65,476.38) 984.25,476.38 ; 1107.28,105.81 v2(1107.28,228.84) 984.25,351.87 984.25,476.38
  Bottom Layer w11.81: U2.48 831.69,964.57 C5.1@866.14,999.02
  Bottom Layer w19.68: P1.4@80.71,355.91 184.09,355.91 v2(185,355) ; v2(185,595) 312.4,595 C14.2 ; v2(361.71,809.55) 361.71,852.85 C11.1@381.4,872.54 ; v2(418.31,145.18) 418.31,252.95 R6.2 ; C7.1@866.14,1085.63 C5.1@866.14,1018.7 ; C5.1 C5.1@866.14,1018.7 ; v2(900.59,105.81) 1107.28,105.81 1141.73,105.81 1271.65,235.73 1271.65,332.68 ; v2(1033.46,1026.08) 873.52,1026.08 C5.1@866.14,1018.7 ; R9.1@1101.38,351.38 R8.1 1222.44,332.68 1271.65,332.68 ; v2(1255.91,842.52) v2(1255.91,814.96) 1255.91,736.3 1265.75,726.45 1265.75,338.58 1271.65,332.68 ; J4.1@1363.19,385.63 1310.24,332.68 1271.65,332.68
  Bottom Layer w31.5: v2(1033.46,1026.08) v2(1060.53,1026.08) v2(1225.39,1026.08) v2(1254.92,1026.08) 1279.53,1026.08 1316.44,1062.99 C2.2@1316.44,1107.28 ; U1.4@1134.35,1360.23 1141.73,1352.85 1141.73,1028.54
pads on no net: M1.0 M2.0 U2.2 U2.3 U2.4 U2.8 U2.9 U2.10 U2.11 U2.15 U2.24 U2.25 U2.26 U2.27 U2.28 U2.29 U2.45 U2.50 U2.56 U2.57 U2.61

## Polygon pours and split planes (outlines as drawn)
GND on Top Layer "GND_L01_P002" (solid, remove dead copper, pour order 2): 19.68,1396.42 19.68,19.68 1397.64,19.68 1397.64,1398.82
GND on Bottom Layer "GND_L02_P000" (solid, remove dead copper, pour order 0): 19.68,1397.64 19.68,19.68 1397.64,19.68 1397.64,1397.64

## Silkscreen, mask and mechanical layers (free items; w line width, h text height)
Top Overlay:
  text "5" at 126.97,1166.34 h60
  text "G" at 242.13,1166.34 h60
  text "P" at 27.56,1163.39 h60
  text "M4" at 322.83,846.46 h60 r270
  text "CD" at 170.28,670.28 h60
  text "CMD" at 164.37,574.8 h60
  text "SDA" at 873.03,518.7 h60
  text "GND" at 166.34,479.33 h60
  text "3V3" at 164.37,385.83 h60
  text "CLK" at 162.4,304.13 h60
  text "SCL" at 1156.5,248.03 h60
  text "5V" at 759.84,233.27 h60 r270
  text "GND" at 164.37,221.46 h60
  text "PPM" at 574.8,143.7 h60
  text "DAT0" at 162.4,133.86 h60
  text "GND" at 875,125.98 h60
Bottom Overlay:
  text "v2.0" at 445.87,1311.02 h60
  text "Rich FC" at 873.03,1311.02 h60
  text "RX" at 1288.39,954.72 h60
  text "TX" at 1288.39,856.3 h60
  text "RESET" at 1288.39,755.41 h60
  text "SWDIO" at 1288.39,659.45 h60
  text "GND" at 1288.39,558.56 h60
  text "SWCLK" at 1307.09,522.64 h60 r90
  text "3V3" at 1386.81,340.55 h60 r90
Mechanical 15:
  the board outline again, w3.94